# Altium PCB power_board.PcbDoc
Units mil, origin at the board's own origin, x right, y up, seen from the top; angles counter-clockwise.
Board outline 5000 x 4000 mil, 2 copper layers (Top Layer, Bottom Layer); 25 components, 16 nets, 66 pads, 19 vias.
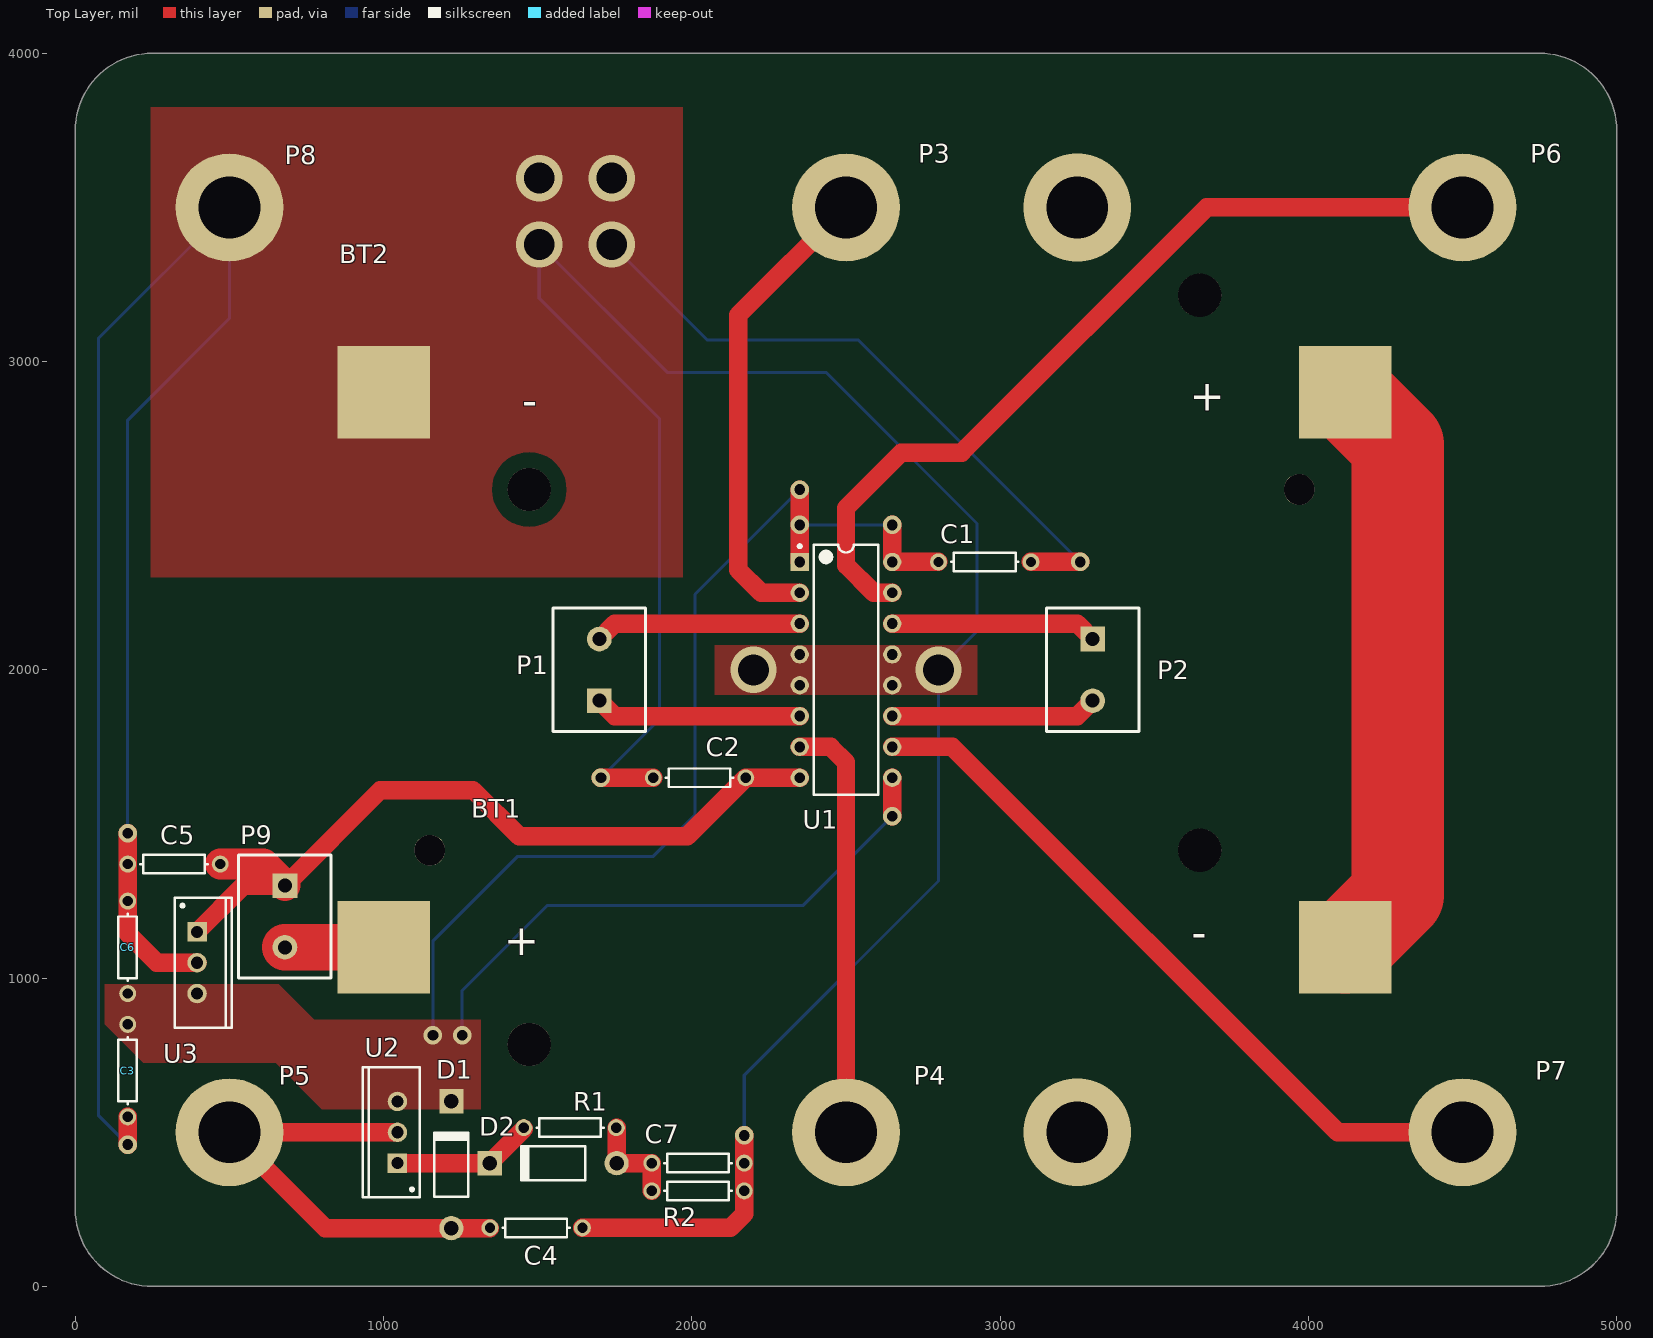
[diagram p0: Top Layer view]
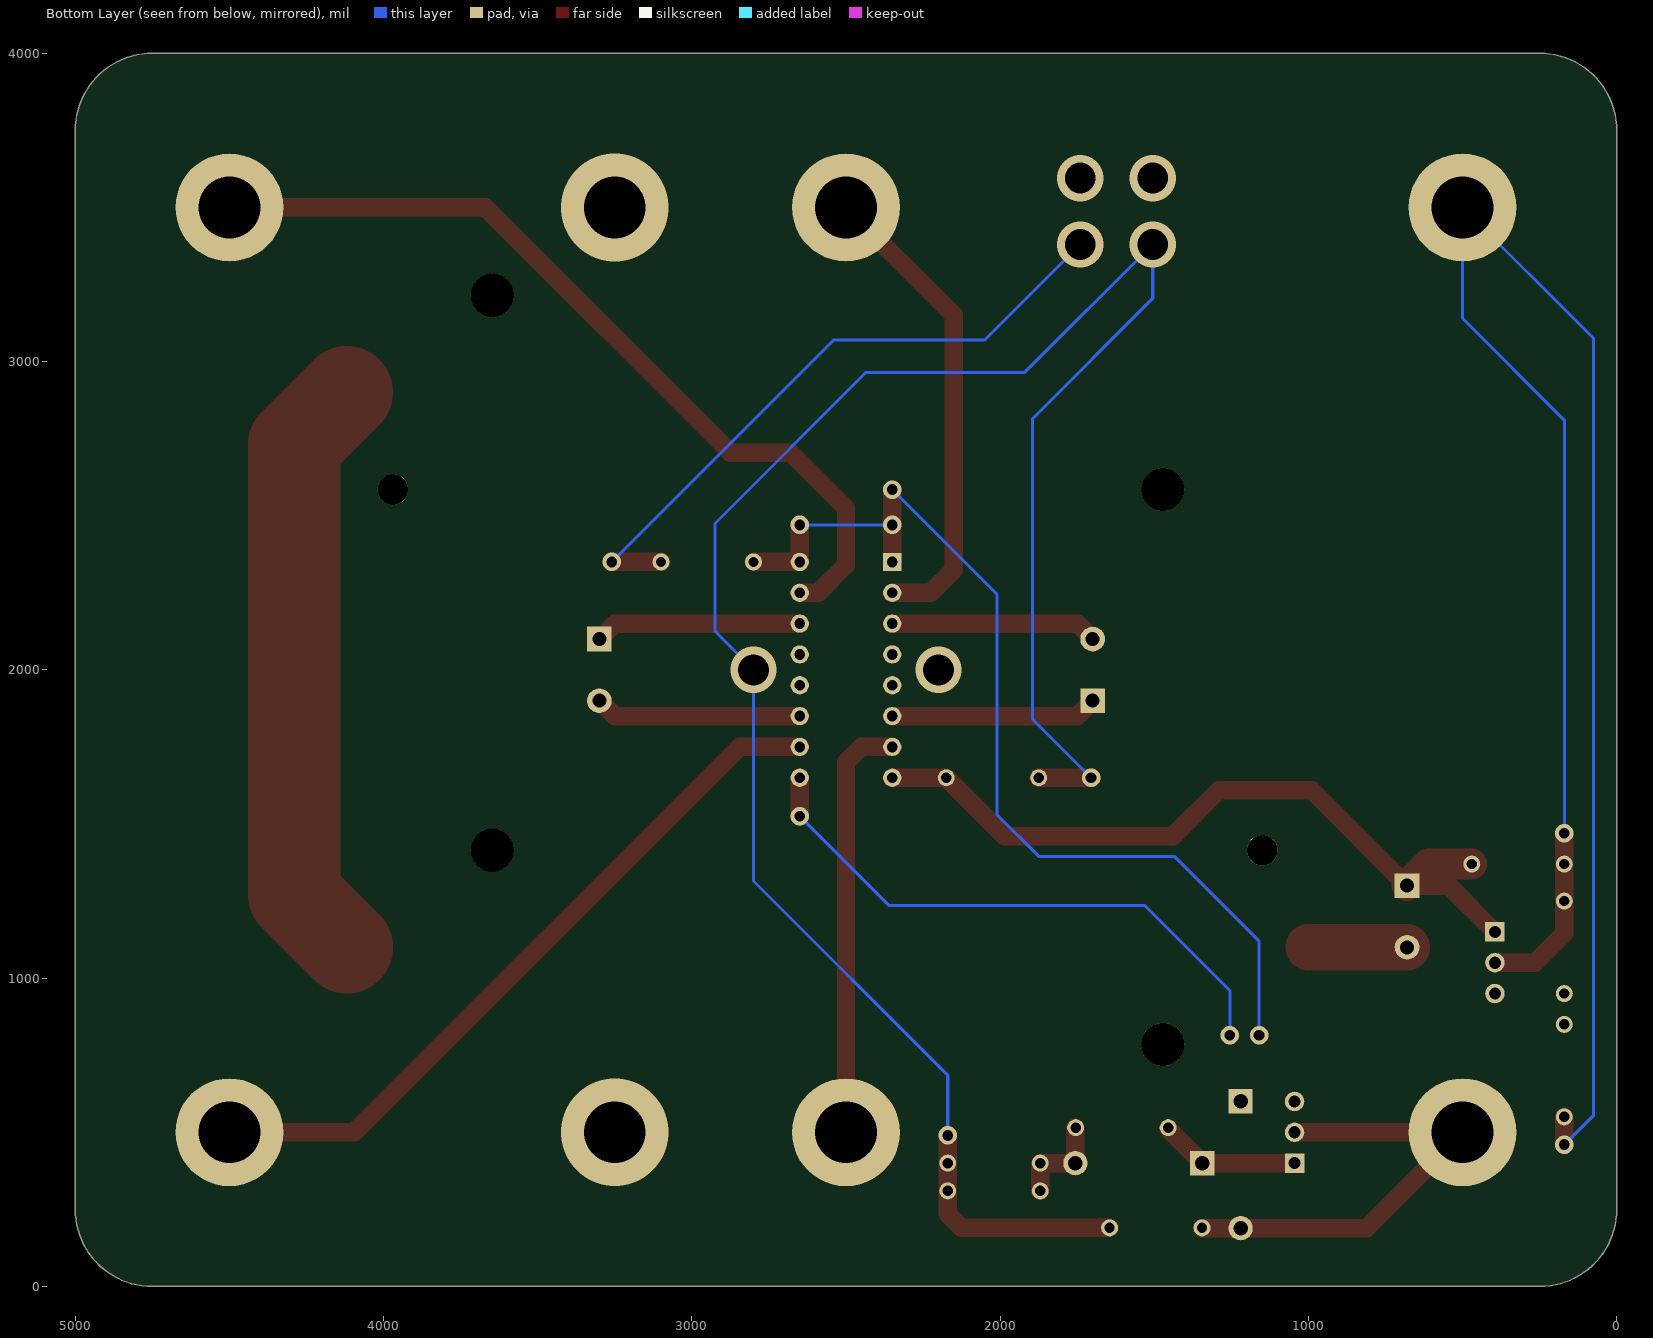
[diagram p1: Bottom Layer view, seen from below]

## Layer stack, top to bottom
Top Solder: solder mask 0.4, Solder Resist, Dk 3.5
Top Layer: signal copper 1.4
Dielectric 1: dielectric 12.6, FR-4, Dk 4.8
Bottom Layer: signal copper 1.4
Bottom Solder: solder mask 0.4, Solder Resist, Dk 3.5

## Board outline
0,250 0,3685 0,3750 cw(c250,3750) 250,4000 4750,4000 cw(c4750,3750) 5000,3750 5000,250 cw(c4750,250) 4750,0 250,0 cw(c250,250)

## Design rules (kind name [scope] priority, off if disabled: settings)
Clearance Clearance_3 [InNamedPolygon('Top Layer-GND 1')] p1: gap=10 ignorepadtopadclearanceinfootprint=FALSE except(0: Arc-Hole Track-Hole SMDPad-Hole THPad-Hole Via-Hole Text-Hole; 50: Fill-Hole Poly-Hole Region-Hole)
Clearance Clearance_2 [InNamedPolygon('Top Layer-GND 1')] p2: gap=10 ignorepadtopadclearanceinfootprint=FALSE except(0: Arc-Hole Track-Hole SMDPad-Hole THPad-Hole Via-Hole Text-Hole; 25: Fill-Hole Poly-Hole Region-Hole)
Clearance Clearance_1 [InNamedPolygon('Top Layer-GND 1')] p3: gap=10 ignorepadtopadclearanceinfootprint=FALSE except(0: Arc-Hole Track-Hole SMDPad-Hole THPad-Hole Via-Hole Fill-Hole Poly-Hole Region-Hole Text-Hole)
Clearance [All] p4: gap=10 ignorepadtopadclearanceinfootprint=FALSE except(0: Arc-Hole Track-Hole SMDPad-Hole THPad-Hole Via-Hole Fill-Hole Poly-Hole Region-Hole Text-Hole)
HoleSize [All] p1: absolutevalues=TRUE maxlimit=500 minlimit=25 maxpercent=80.000 minpercent=20.000
MinimumAnnularRing [All] p1: minimumring=9.8
NetAntennae [All] p1 off: netantennaetolerance=0
PolygonConnect full_2 [All vs IsNamedPolygon('Top Layer-5V')] p1: connectstyle=Direct reliefconductorwidth=10 reliefentries=4 polygonreliefangle="90 Angle" airgapwidth=10
PolygonConnect full_1 [All vs IsNamedPolygon('Top Layer-GND')] p2: connectstyle=Direct reliefconductorwidth=10 reliefentries=4 polygonreliefangle="90 Angle" airgapwidth=10
PolygonConnect full [All vs IsNamedPolygon('Top Layer-GND 1')] p3: connectstyle=Direct reliefconductorwidth=10 reliefentries=4 polygonreliefangle="90 Angle" airgapwidth=10
PolygonConnect solid [All vs IsNamedPolygon('Top Layer-GND')] p4: connectstyle=Direct reliefconductorwidth=10 reliefentries=4 polygonreliefangle="90 Angle" airgapwidth=10
PolygonConnect [All] p5: connectstyle=Relief reliefconductorwidth=10 reliefentries=4 polygonreliefangle="90 Angle" airgapwidth=10
RoomDefinition power_board [InComponentClass('power_board')] p1: confinementstyle=ConfineIn formatcopy=TRUE lockcomponents=FALSE outline 0,0 5015,0 5015,4010 0,4010
RoutingVias [All] p1: holewidth=28 width=50 viastyle="Through Hole" minholewidth=28 minwidth=50 maxholewidth=28 maxwidth=50
SilkToSolderMaskClearance [IsPad] p1 off: minsilkscreentomaskgap=10 clearancetoexposedcopper=TRUE
SolderMaskExpansion [All] p1: expansion=4
Width [All] p1: maxlimit=500 minlimit=10 preferedwidth=10
27 further rules are at their usual default settings.

## Components (designator, comment, footprint, x,y, rotation, side; value= is the part's Value field where it differs from the comment)
BT1 "Battery" VBATT 4120,1100 r180 top
BT2 "Battery" VBATT 1000,2900 r0 top
C1 "Cap" AXIAL-0.3 2950,2350 r0 top value=0.1uF
C2 "Cap" AXIAL-0.3 2025,1650 r0 top value=1uF
C3 "Cap Pol3" AXIAL-0.3 170,700 r270 top value=0.1uF
C4 "Cap Pol3" AXIAL-0.3 1495,190 r0 top value=1uF
C5 "Cap Pol3" AXIAL-0.3 320,1370 r180 top value=0.22uF
C6 "Cap Pol3" AXIAL-0.3 170,1100 r90 top value=0.1uF
C7 "Cap Pol3" AXIAL-0.3 2020,400 r0 top value=10uF
D1 "Diode 1N4002" DO-41 1220,395 r90 top
D2 "Diode 1N4002" DO-41 1550,400 r180 top
P1 "Left Motor" "Screw Terminal" 1700,1900 r90 top
P2 "Right Motor" "Screw Terminal" 3300,2100 r270 top
P3 "Plug" STANDOFF#1 2425,2870 r0 top
P4 "Plug" STANDOFF#2 1660,345 r0 top
P5 "Plug" STANDOFF#3 250,255 r0 top
P6 "Plug" STANDOFF#4 5250,3870 r0 top
P7 "Plug" STANDOFF#5 3820,1120 r0 top
P8 "Plug" STANDOFF#6 565,3400 r0 top
P9 "Master Switch" "Screw Terminal" 680,1300 r270 top
R1 "Res1" AXIAL-0.3 1605,515 r180 top value=1K
R2 "Res1" AXIAL-0.3 2020,310 r180 top value=1K
U1 "L293D" DIP-16 2500,2000 r0 top
U2 "Adjustable Linear Regulator" TO-220AB 1045,500 r90 top
U3 "5V Linear Regulator" TO-220AB 395,1050 r270 top

## Footprints (in the part's own frame and the unit in brackets; to place one, negate y for a bottom-side part, rotate by r counter-clockwise, add the part's x,y. Pads: shape width x height; smd on the part's side, far side on the other; paste and mask are expansions set on the pad)
AXIAL-0.3 [mm] "Axial Device, Thru-Hole; 2 Leads; 0.3 in Pin Spacing"
  round 1.4 hole 0.85: 1(-3.81,0) 2(3.81,0)
  silkscreen extent -2.77,-0.76 2.77,0.76
DIP-16 [mm] "DIP; 16 Leads; Row Spacing 7.62 mm; Pitch 2.54 mm"
  rect 1.5x1.5 hole 0.9: 1(-3.81,8.89)
  round 1.5 hole 0.9: 2(-3.81,6.35) 3(-3.81,3.81) 4(-3.81,1.27) 5(-3.81,-1.27) 6(-3.81,-3.81) 7(-3.81,-6.35) 8(-3.81,-8.89) 9(3.81,-8.89) 10(3.81,-6.35) 11(3.81,-3.81) 12(3.81,-1.27) 13(3.81,1.27) 14(3.81,3.81) 15(3.81,6.35) 16(3.81,8.89)
  silkscreen extent -3.93,-10.3 2.65,10.31, body extent -3.6,-10.28 3.6,10.28, height 5.08
DO-41 [mm] "Diode, Axial; Body 5.2 x 2.7 mm (LxDia. max), Lead Dia. 0.86 mm (max)"
  round 2 hole 1.2: 1(-5.23,0)
  rect 2x2 hole 1.2: 2(5.23,0)
  silkscreen extent -2.65,-1.4 2.75,1.4
"Screw Terminal" [mil]
  rect 80x80 hole 45: 1(0,0)
  round 80 hole 45: 2(200,0)
  silkscreen extent -100,-150 300,150
STANDOFF#1 [mil]
  round 350 hole 200: 1(75,630)
STANDOFF#2 [mil]
  round 350 hole 200: 1(840,155)
STANDOFF#3 [mil]
  round 350 hole 200: 1(250,245)
STANDOFF#4 [mil]
  round 350 hole 200: 1(-750,-370)
STANDOFF#5 [mil]
  round 350 hole 200: 1(680,-620)
STANDOFF#6 [mil]
  round 350 hole 200: 1(-65,100)
TO-220AB [mm] "TO, Thru-Hole, Vertical, Heatsink Mounted; 3 In-Line Leads; Pitch 2.54 mm"
  rect 1.6x1.6 hole 1: 1(-2.54,0)
  round 1.6 hole 1: 2(0,0) 3(2.54,0)
  silkscreen extent -5.35,-1.85 5.35,2.85, body extent -5.4,-1.9 5.4,2.9, height 19.3
VBATT [mil]
  rect 300x300 smd: 1(0,0) 2(3120,0)
  round 140 hole 140: MP(472.5,-315) MP(2647.5,315)
  round 100 hole 100: MP(2970,-315)

## Part data
BT1 BT2: "Multicell Battery", LatestRevisionDate=17-Jul-2002, LatestRevisionNote="Re-released for DXP Platform.", PackageDescription="Battery; 2 Leads", PackageReference=BAT-2, Published=24-Mar-1999, Publisher="Altium Limited"
C1 C2: "Capacitor", LatestRevisionDate=17-Jul-2002, LatestRevisionNote="Re-released for DXP Platform.", PackageDescription="Radial Cap, Thru-Hole; 2 Leads; 0.3 in Pin Spacing", PackageReference=RAD-0.3, Published=8-Jun-2000, Publisher="Altium Limited"
C3 C4 C5 C6 C7: "Polarized Capacitor (Surface Mount)", LatestRevisionDate=29-May-2009, LatestRevisionNote="IPC-7351 Footprint Added.", PackageDescription="Chip Capacitor", PackageReference=C0805, Published=8-Jun-2000, Publisher="Altium Limited"
D1 D2: "1 Amp General Purpose Rectifier", Code_JEDEC=DO-204-AL, ComponentLink1Description="Manufacturer Link", ComponentLink1URL=http://www.fairchildsemi.com/, ComponentLink2Description=Datasheet, ComponentLink2URL=http://www.fairchildsemi.com/ds/1N%2F1N4001.pdf, DatasheetVersion=1998, LatestRevisionDate=17-Jul-2002, LatestRevisionNote="Re-released for DXP Platform.", PackageDescription="Diode, Axial; Body 5.2 x 2.7 mm (LxDia. max), Lead Dia. 0.86 mm (max)", PackageReference=DO-41, PackageVersion=Aug-1999, Published=8-Jun-2000, Publisher="Altium Limited"
P1 P2 P9: library part "Header 2", "Header, 2-Pin", LatestRevisionDate=17-Jul-2002, LatestRevisionNote="Re-released for DXP Platform.", Publisher="Altium Limited"
R1 R2: "Resistor", LatestRevisionDate=17-Jul-2002, LatestRevisionNote="Re-released for DXP Platform.", PackageDescription="Axial Device, Thru-Hole; 2 Leads; 0.3 in Pin Spacing", PackageReference=AXIAL-0.3, Published=8-Jun-2000, Publisher="Altium Limited"
U2: library part LM317T
U3: library part LM7805C
P3 P4 P5 P6 P7 P8: LatestRevisionDate=17-Jul-2002, LatestRevisionNote="Re-released for DXP Platform.", Publisher="Altium Limited"

## Via types
v1: diameter 60, hole 35, Top Layer to Bottom Layer, 11 vias
v2: diameter 150, hole 100, Top Layer to Bottom Layer, 6 vias
v3: diameter 350, hole 200, Top Layer to Bottom Layer, 2 vias

## Nets (pads, with @x,y where several pads share a name; then routed paths per layer and width w, separated by ;. In a path a pad name is that pad's centre, name@x,y a point inside that pad or via, vN(x,y) a via of type N, cw(c..) or ccw(c..) an arc to the next point about the centre after c; other vN are vias at no path point)
3.3V: C4.1 D1.1 P5.1 U2.2 | length 1519.2
  Top Layer w10: C4.1@1344.09,189.09 C4.1
  Top Layer w60: U2.2 P5.1 810.91,189.09 D1.1 C4.1@1344.09,189.09
5V: C1.1 C3.1 C6.1 D1.2 U1.1 U1.9 U1.16 U2.3 U3.3 | length 5226
  Top Layer w10: D1.2@1219.09,600 D1.2
  Top Layer w60: U1.1 v1(2350,2470) v1(2350,2585) ; v1(2650,1525) U1.9 ; v1(2650,2470) U1.16 C1.1
  Bottom Layer w10: v1(1160,815) 1160,1120 1435,1395 1875,1395 2010,1530 2010,2245 v1(2350,2585) ; v1(1254.91,815) 1254.91,959.91 1530,1235 2360,1235 v1(2650,1525) ; v1(2350,2470) v1(2650,2470)
GND: BT2.1 C1.2 C2.1 C3.2 C4.2 C5.2 C6.2 C7.2 P8.1 R2.1 U1.4 U1.5 U1.12 U1.13 U3.2 | length 15239.5
  Top Layer w60: v1(170,460) C3.2 ; v1(170,1470) C5.2 C6.2 170,1145 265,1050 U3.2 ; C4.2 2125,190 2170,235 R2.1 C7.2 v1(2170,490) ; v1(1705,1650) C2.1 ; C1.2 v1(3260,2350)
  Bottom Layer w10: v1(170,460) 75,555 75,3075 P8.1 500,3140 170,2810 v1(170,1470) ; v1(1705,1650) 1895,1840 1895,2815 1505,3205 v2(1505,3380) 1920,2965 2435,2965 2925,2475 2925,2125 v2(2800,2000) 2800,1315 2170,685 v1(2170,490) ; v2(1740,3380) 2050,3070 2540,3070 v1(3260,2350)
  other v2: 2200,2000 1505,3595 1740,3595
L_BKD: P4.1 U1.7 | length 1370.7
  Top Layer w60: U1.7 2450,1750 2500,1700 P4.1
L_FWD: P3.1 U1.2 | length 1551
  Top Layer w60: U1.2 2225,2250 2150,2325 2150,3150 P3.1
NetBT1_1: BT1.2 P9.2 | length 320
  Top Layer w150: P9.2 BT1.2
NetBT1_2: BT1.1 BT2.2 | length 1940.8
  Top Layer w300: BT1.1 4290,1270 4290,2730 BT2.2
NetC7_1: C7.1 D2.1 R1.1 R2.2 | length 319.5
  Top Layer w10: R1.1 R1.1@1755.91,514.09
  Top Layer w60: R1.1@1755.91,514.09 D2.1 C7.1 R2.2
NetD2_2: D2.2 R1.2 U2.1 | length 460
  Top Layer w10: R1.2@1455,510.91 R1.2
  Top Layer w60: U2.1 D2.2 R1.2@1455,510.91
NetP1_1: P1.1 U1.6 | length 670.7
  Top Layer w60: P1.1 1750,1850 U1.6
NetP1_2: P1.2 U1.3 | length 670.7
  Top Layer w60: P1.2 1750,2150 U1.3
NetP2_1: P2.1 U1.14 | length 670.7
  Top Layer w60: U1.14 3250,2150 P2.1
NetP2_2: P2.2 U1.11 | length 670.7
  Top Layer w60: U1.11 3250,1850 P2.2
R_BKD: P7.1 U1.10 | length 2367.8
  Top Layer w60: U1.10 2845,1750 4095,500 P7.1
R_FWD: P6.1 U1.15 | length 2776.1
  Top Layer w60: U1.15 2590,2250 2500,2340 2500,2525 2680,2705 2875,2705 3670,3500 P6.1
VBATT: C2.2 C5.1 P9.1 U1.8 U3.1 | length 2525.4
  Top Layer w60: U3.1 545,1300 P9.1 990,1610 1290,1610 1440,1460 1985,1460 C2.2 U1.8
  Top Layer w100: C5.1 610,1370 P9.1
pads on no net: BT1.MP BT2.MP
copper on no net:
  other v3: 3250,500 3250,3500

## Polygon pours and split planes (outlines as drawn)
5V on Top Layer "Top Layer-5V" (solid, pour order 6): 800,575 650,725 220,725 95,850 95,980 660,980 775,865 1315,865 1315,575
GND on Top Layer "Top Layer-GND 1" (solid, pour order 4): 1970,2300 245,2300 245,3825 1970,3825
GND on Top Layer "Top Layer-GND" (solid, pour order 2): 2075,2080 2075,1920 2925,1920 2925,2080
no net on Top Layer "Top Layer-No Net" (solid, pour order 0): 2325,2075

## Silkscreen, mask and mechanical layers (free items; w line width, h text height)
Mechanical 1:
  lines w20: 0,3685 0,3750 cw(c250,3750) 250,4000 4750,4000 cw(c4750,3750) 5000,3750 5000,250 cw(c4750,250) 4750,0 250,0 ; 0,3685 0,250 ccw(c250,250) 250,0 ; 0,3685 0,3685 ; 250,0 250,0

## Text inside footprints (layer, text, board x,y; h text height)
BT1: Top Overlay "+" at 1505,1160 h100 r180; Top Overlay "-" at 3670,1175 h100 r180
BT2: Top Overlay "-" at 1450,2825 h100; Top Overlay "+" at 3615,2840 h100